# EAGLE board BluetoothBoard (EAGLE 7.6.0)
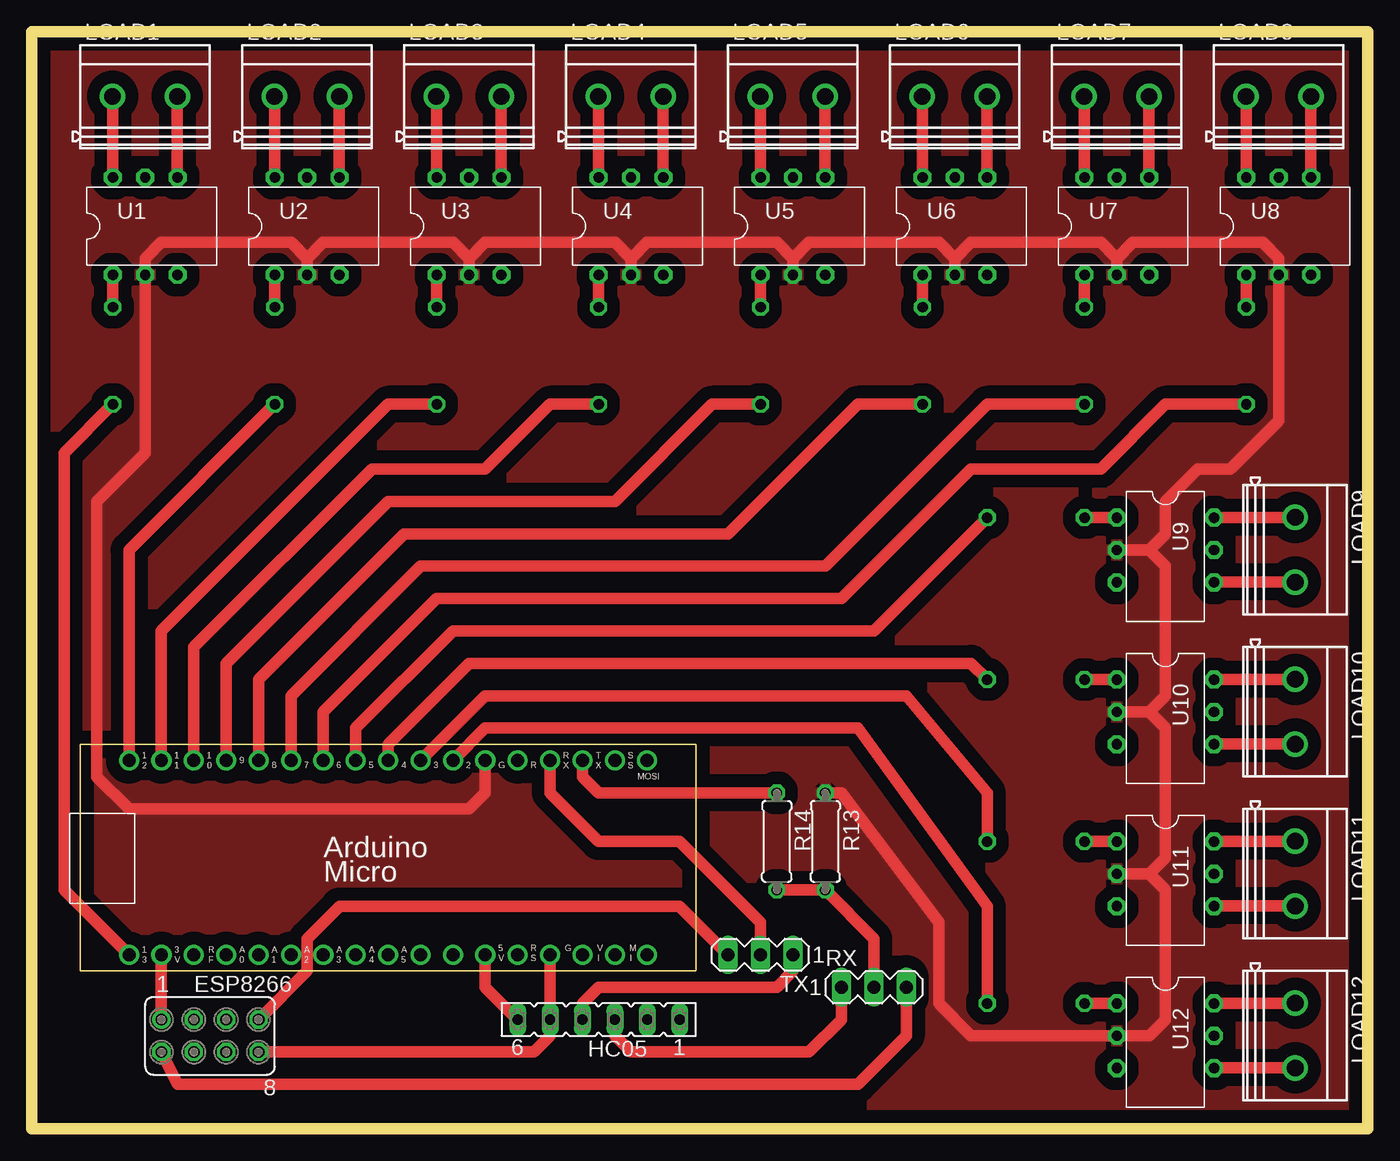
[diagram p0: board, top side]
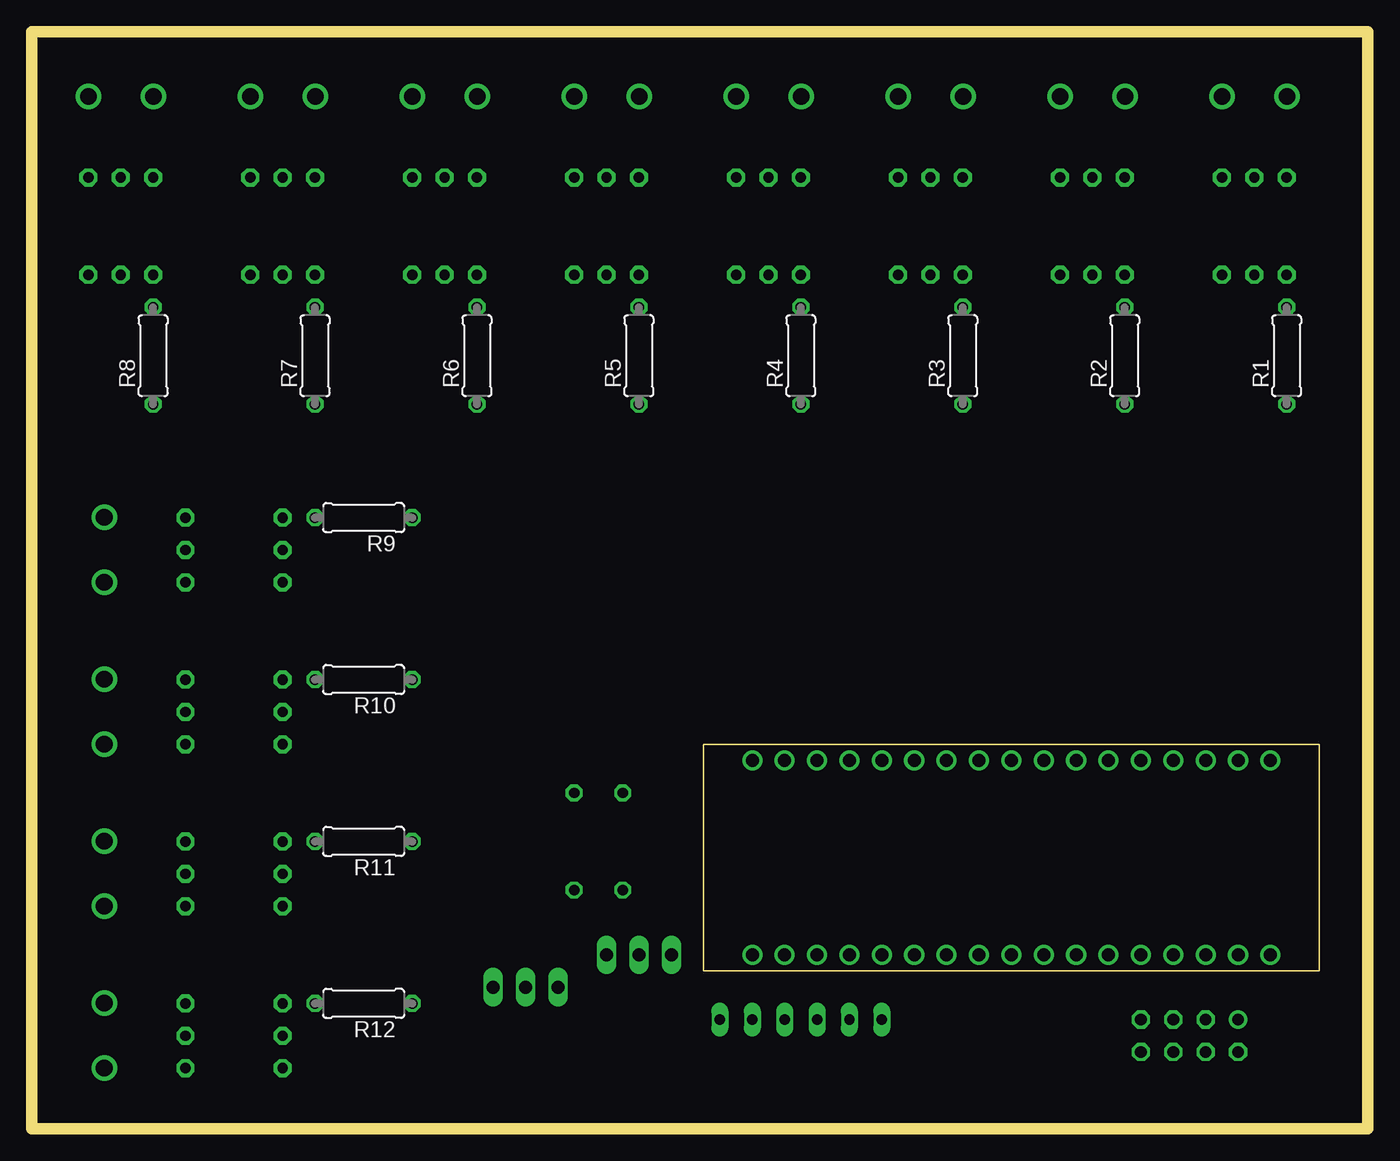
[diagram p1: board, bottom side, seen from below]

Size 104.76 x 86.03 mm. Coordinates in mm from the lower left corner, seen from the top.
Outline: 0,86.03 104.76,86.03 104.76,0 0,0 0,86.03
Copper layers (1*16): Top 0.035mm / dielectric 1.5mm / Bottom 0.035mm
Design rules "default": minimum track width 10mil, minimum drill 24mil, track to track 8mil, track to pad 8mil, pad to pad 8mil, via to via 8mil, smd to smd 8mil, copper to edge 40mil, drill to drill 8mil, minimum pad ring 10mil, minimum via ring 8mil, stop-mask expansion 4mil, vias tented up to drill 0mil, thermal gap 10mil

## Footprints (pad centres in the part's own frame; a part is rotated, then mirrored left to right if it is on the bottom)
ESP8266 = drill 0.914: 1 -5.08,1.27 | drill 0.914 octagon: 2 -5.08,-1.27; 3 -2.54,1.27; 4 -2.54,-1.27; 5 0,1.27; 6 0,-1.27; 7 2.54,1.27; 8 2.54,-1.27
FE06 = drill 0.813 long: 1 -6.35,0; 2 -3.81,0; 3 -1.27,0; 4 1.27,0; 5 3.81,0; 6 6.35,0
MKDSN1,5/2-5,08 = drill 1.3 pad 2: 1 -2.561,0.025; 2 2.519,0.025
0207/7 = drill 0.813 octagon: 1 -3.81,0; 2 3.81,0
MA03-1 = drill 1.016 long: 1 -2.54,0; 2 0,0; 3 2.54,0
DIL-06 = drill 0.813 pad 1.397 octagon: 1 1.27,0; 2 3.81,0; 3 6.35,0; 4 6.35,7.62; 5 3.81,7.62; 6 1.27,7.62
ARDUINO_MICRO = drill 1.016 pad 1.575: 3V3 6.35,1.27; +5V 31.75,1.27; A0 11.43,1.27; A1 13.97,1.27; A2 16.51,1.27; A3 19.05,1.27; A4 21.59,1.27; A5 24.13,1.27; D2 29.21,16.51; D3 26.67,16.51; D4 24.13,16.51; D5 21.59,16.51; D6 19.05,16.51; D7 16.51,16.51; D8 13.97,16.51; D9 11.43,16.51; D10 8.89,16.51; D11 6.35,16.51; D12 3.81,16.51; D13 3.81,1.27; GND 31.75,16.51; GND. 36.83,1.27; MISO] 41.91,1.27; MOSI 44.45,16.51; NC 26.67,1.27; NC. 29.21,1.27; REF 8.89,1.27; RST 34.29,16.51; RST. 34.29,1.27; RX1 36.83,16.51; SCK 44.45,1.27; SS 41.91,16.51; TX1 39.37,16.51; VIN 39.37,1.27

## Placement (x,y rotation side)
ESP8266  [ESP8266]  15.24,7.29 0 top
HC05  [FE06]  44.45,8.56 180 top
LOAD1  [MKDSN1,5/2-5,08]  8.89,80.95 0 top
LOAD2  [MKDSN1,5/2-5,08]  21.59,80.95 0 top
LOAD3  [MKDSN1,5/2-5,08]  34.29,80.95 0 top
LOAD4  [MKDSN1,5/2-5,08]  46.99,80.95 0 top
LOAD5  [MKDSN1,5/2-5,08]  59.69,80.95 0 top
LOAD6  [MKDSN1,5/2-5,08]  72.39,80.95 0 top
LOAD7  [MKDSN1,5/2-5,08]  85.09,80.95 0 top
LOAD8  [MKDSN1,5/2-5,08]  97.79,80.95 0 top
LOAD9  [MKDSN1,5/2-5,08]  99.06,45.39 270 top
LOAD10  [MKDSN1,5/2-5,08]  99.06,32.69 270 top
LOAD11  [MKDSN1,5/2-5,08]  99.06,19.99 270 top
LOAD12  [MKDSN1,5/2-5,08]  99.06,7.29 270 top
R1  150  [0207/7]  6.35,60.63 90 bottom
R2  150  [0207/7]  19.05,60.63 90 bottom
R3  150  [0207/7]  31.75,60.63 90 bottom
R4  150  [0207/7]  44.45,60.63 90 bottom
R5  150  [0207/7]  57.15,60.63 90 bottom
R6  150  [0207/7]  69.85,60.63 90 bottom
R7  150  [0207/7]  82.55,60.63 90 bottom
R8  150  [0207/7]  95.25,60.63 90 bottom
R9  150  [0207/7]  78.74,47.93 180 bottom
R10  150  [0207/7]  78.74,35.23 180 bottom
R11  150  [0207/7]  78.74,22.53 180 bottom
R12  150  [0207/7]  78.74,9.83 180 bottom
R13  20k  [0207/7]  62.23,22.53 270 top
R14  10k  [0207/7]  58.42,22.53 270 top
RX  [MA03-1]  66.04,11.1 0 top
TX  [MA03-1]  57.15,13.64 180 top
U1  LCA710  [DIL-06]  5.08,66.98 0 top
U2  LCA710  [DIL-06]  17.78,66.98 0 top
U3  LCA710  [DIL-06]  30.48,66.98 0 top
U4  LCA710  [DIL-06]  43.18,66.98 0 top
U5  LCA710  [DIL-06]  55.88,66.98 0 top
U6  LCA710  [DIL-06]  68.58,66.98 0 top
U7  LCA710  [DIL-06]  81.28,66.98 0 top
U8  LCA710  [DIL-06]  93.98,66.98 0 top
U9  LCA710  [DIL-06]  85.09,49.2 270 top
U10  LCA710  [DIL-06]  85.09,36.5 270 top
U11  LCA710  [DIL-06]  85.09,23.8 270 top
U12  LCA710  [DIL-06]  85.09,11.1 270 top
UC  ARDUINO_MICRO  [ARDUINO_MICRO]  3.81,12.37 0 top

## Library data of the parts
ESP8266 = ESP8266
HC05 = con-lsta; OC_FARNELL: unknown; OC_NEWARK: unknown
LOAD1-LOAD12 = con-phoenix-508
R1-R14 = resistor
RX TX = con-lstb; OC_FARNELL: unknown; OC_NEWARK: unknown
U1-U12 = LCA710
UC = E14_Arduino_revB

## Nets
GND: R13.1 U1.2 U2.2 U3.2 U4.2 U5.2 U6.2 U7.2 U8.2 U9.2 U10.2 U11.2 U12.2 UC.GND
N$1: R1.2 U1.1
N$2: LOAD1.2 U1.4
N$3: LOAD1.1 U1.6
N$4: R2.2 U2.1
N$5: LOAD2.1 U2.6
N$6: LOAD2.2 U2.4
N$7: R3.2 U3.1
N$8: LOAD3.1 U3.6
N$9: LOAD3.2 U3.4
N$10: R4.2 U4.1
N$11: LOAD4.1 U4.6
N$12: LOAD4.2 U4.4
N$13: R5.2 U5.1
N$14: LOAD5.1 U5.6
N$15: LOAD5.2 U5.4
N$16: R6.2 U6.1
N$17: LOAD6.1 U6.6
N$18: LOAD6.2 U6.4
N$19: TX.2 UC.RX1
N$20: ESP8266.1 UC.3V3
N$21: R14.1 UC.TX1
N$22: ESP8266.2 RX.3
N$23: R7.2 U7.1
N$24: LOAD7.1 U7.6
N$25: LOAD7.2 U7.4
N$26: R13.2 R14.2 RX.2
N$27: R8.2 U8.1
N$28: LOAD8.1 U8.6
N$29: HC05.6 UC.+5V
N$30: HC05.3 RX.1
N$31: LOAD8.2 U8.4
N$32: ESP8266.7 TX.3
N$33: HC05.4 TX.1
N$34: R9.2 U9.1
N$35: LOAD9.1 U9.6
N$36: LOAD9.2 U9.4
N$37: R10.2 U10.1
N$38: LOAD10.1 U10.6
N$39: LOAD10.2 U10.4
N$40: R11.2 U11.1
N$41: LOAD11.1 U11.6
N$42: LOAD11.2 U11.4
N$43: R12.2 U12.1
N$44: LOAD12.1 U12.6
N$45: LOAD12.2 U12.4
N$47: ESP8266.8 HC05.5 UC.GND.
N$49: R12.1 UC.D2
N$50: R11.1 UC.D3
N$51: R10.1 UC.D4
N$52: R9.1 UC.D5
N$53: R8.1 UC.D6
N$54: R7.1 UC.D7
N$55: R6.1 UC.D8
N$56: R5.1 UC.D9
N$57: R4.1 UC.D10
N$58: R3.1 UC.D11
N$59: R1.1 UC.D13
N$60: R2.1 UC.D12

## Tracks (layer width: path | path; a pad name or v marks a point on that pad's centre or on a via)
GND
  Top 0.9: 87.63,19.99 88.9,18.72 88.9,8.56 87.63,7.29 U12.2 73.66,7.29 71.12,9.83 71.12,16.18 63.5,26.34 R13.1 | U11.2 87.63,19.99 | 87.63,19.99 88.9,21.26 88.9,31.42 87.63,32.69 | U10.2 87.63,32.69 | 87.63,32.69 88.9,33.96 88.9,44.12 87.63,45.39 | U9.2 87.63,45.39 | 87.63,45.39 88.9,46.66 88.9,49.2 91.44,51.74 93.98,51.74 97.79,55.55 U8.2 97.79,68.25 96.52,69.52 86.36,69.52 85.09,68.25 | U7.2 85.09,68.25 | 85.09,68.25 83.82,69.52 73.66,69.52 72.39,68.25 | U6.2 72.39,68.25 | 72.39,68.25 71.12,69.52 60.96,69.52 59.69,68.25 | U5.2 59.69,68.25 | 59.69,68.25 58.42,69.52 48.26,69.52 46.99,68.25 | U4.2 46.99,68.25 | 46.99,68.25 45.72,69.52 35.56,69.52 34.29,68.25 | U3.2 34.29,68.25 | 34.29,68.25 33.02,69.52 22.86,69.52 21.59,68.25 | U2.2 21.59,68.25 | 21.59,68.25 20.32,69.52 10.16,69.52 8.89,68.25 U1.2 8.89,53.01 5.08,49.2 5.08,27.61 7.62,25.07 34.29,25.07 35.56,26.34 UC.GND
  pour Top (isolate 1): 104.14,86.03 104.14,0.94 0,0.94 0,86.03
N$1
  Top 0.9: R1.2 U1.1
N$2
  Top 0.9: LOAD1.2 11.41,74.62 U1.4
N$3
  Top 0.9: LOAD1.1 6.33,74.62 U1.6
N$4
  Top 0.9: R2.2 U2.1
N$5
  Top 0.9: LOAD2.1 19.03,74.62 U2.6
N$6
  Top 0.9: LOAD2.2 24.11,74.62 U2.4
N$7
  Top 0.9: R3.2 U3.1
N$8
  Top 0.9: LOAD3.1 31.73,74.62 U3.6
N$9
  Top 0.9: LOAD3.2 36.81,74.62 U3.4
N$10
  Top 0.9: R4.2 U4.1
N$11
  Top 0.9: LOAD4.1 44.43,74.62 U4.6
N$12
  Top 0.9: LOAD4.2 49.51,74.62 U4.4
N$13
  Top 0.9: R5.2 U5.1
N$14
  Top 0.9: LOAD5.1 57.13,74.62 U5.6
N$15
  Top 0.9: LOAD5.2 62.21,74.62 U5.4
N$16
  Top 0.9: R6.2 U6.1
N$17
  Top 0.9: LOAD6.1 69.83,74.62 U6.6
N$18
  Top 0.9: LOAD6.2 74.91,74.62 U6.4
N$19
  Top 0.9: UC.RX1 40.64,26.34 44.45,22.53 50.8,22.53 57.15,16.18 TX.2
N$20
  Top 0.9: ESP8266.1 UC.3V3
N$21
  Top 0.9: R14.1 44.45,26.34 43.18,27.61 UC.TX1
N$22
  Top 0.9: RX.3 68.58,7.29 64.77,3.48 11.43,3.48 ESP8266.2
N$23
  Top 0.9: R7.2 U7.1
N$24
  Top 0.9: LOAD7.1 82.53,74.62 U7.6
N$25
  Top 0.9: LOAD7.2 87.61,74.62 U7.4
N$26
  Top 0.9: R14.2 R13.2 66.04,14.91 RX.2
N$27
  Top 0.9: R8.2 U8.1
N$28
  Top 0.9: LOAD8.1 95.23,74.62 U8.6
N$29
  Top 0.9: UC.+5V 35.56,11.1 HC05.6
N$30
  Top 0.9: RX.1 63.5,8.56 60.96,6.02 46.99,6.02 45.72,7.29 HC05.3
N$31
  Top 0.9: LOAD8.2 100.31,74.62 U8.4
N$32
  Top 0.9: TX.3 50.8,17.45 24.13,17.45 21.59,14.91 21.59,12.37 ESP8266.7
N$33
  Top 0.9: HC05.4 43.18,9.83 44.45,11.1 58.42,11.1 59.69,12.37 TX.1
N$34
  Top 0.9: U9.1 R9.2
N$35
  Top 0.9: LOAD9.1 92.73,47.95 U9.6
N$36
  Top 0.9: LOAD9.2 92.73,42.87 U9.4
N$37
  Top 0.9: U10.1 R10.2
N$38
  Top 0.9: LOAD10.1 92.73,35.25 U10.6
N$39
  Top 0.9: LOAD10.2 92.73,30.17 U10.4
N$40
  Top 0.9: U11.1 R11.2
N$41
  Top 0.9: LOAD11.1 92.73,22.55 U11.6
N$42
  Top 0.9: LOAD11.2 92.73,17.47 U11.4
N$43
  Top 0.9: U12.1 R12.2
N$44
  Top 0.9: LOAD12.1 92.73,9.85 U12.6
N$45
  Top 0.9: LOAD12.2 92.73,4.77 U12.4
N$47
  Top 0.9: UC.GND. HC05.5 40.64,7.29 39.37,6.02 ESP8266.8
N$49
  Top 0.9: R12.1 74.93,17.45 64.77,31.42 35.56,31.42 UC.D2
N$50
  Top 0.9: R11.1 74.93,26.34 68.58,33.96 35.56,33.96 UC.D3
N$51
  Top 0.9: UC.D4 27.94,30.15 34.29,36.5 73.66,36.5 R10.1
N$52
  Top 0.9: R9.1 66.04,39.04 33.02,39.04 25.4,31.42 UC.D5
N$53
  Top 0.9: R8.1 88.9,56.82 83.82,51.74 73.66,51.74 63.5,41.58 31.75,41.58 22.86,32.69 UC.D6
N$54
  Top 0.9: R7.1 74.93,56.82 62.23,44.12 30.48,44.12 20.32,33.96 UC.D7
N$55
  Top 0.9: R6.1 64.77,56.82 54.61,46.66 29.21,46.66 17.78,35.23 UC.D8
N$56
  Top 0.9: R5.1 53.34,56.82 45.72,49.2 27.94,49.2 15.24,36.5 UC.D9
N$57
  Top 0.9: R4.1 40.64,56.82 35.56,51.74 26.67,51.74 12.7,37.77 UC.D10
N$58
  Top 0.9: R3.1 27.94,56.82 10.16,39.04 UC.D11
N$59
  Top 0.9: UC.D13 2.54,18.72 2.54,53.01 R1.1
N$60
  Top 0.9: UC.D12 7.62,45.39 R2.1